# Altium PCB circuit_everything.PcbDoc (part 1 of 3)
Units mm, origin at the board's own origin, x right, y up, seen from the top; angles counter-clockwise.
Board outline 169.67 x 159.89 mm, 2 copper layers (Top Layer, Bottom Layer); 242 components, 162 nets, 656 pads, 43 vias.
Unrouted connection lines stored in the file: 9.
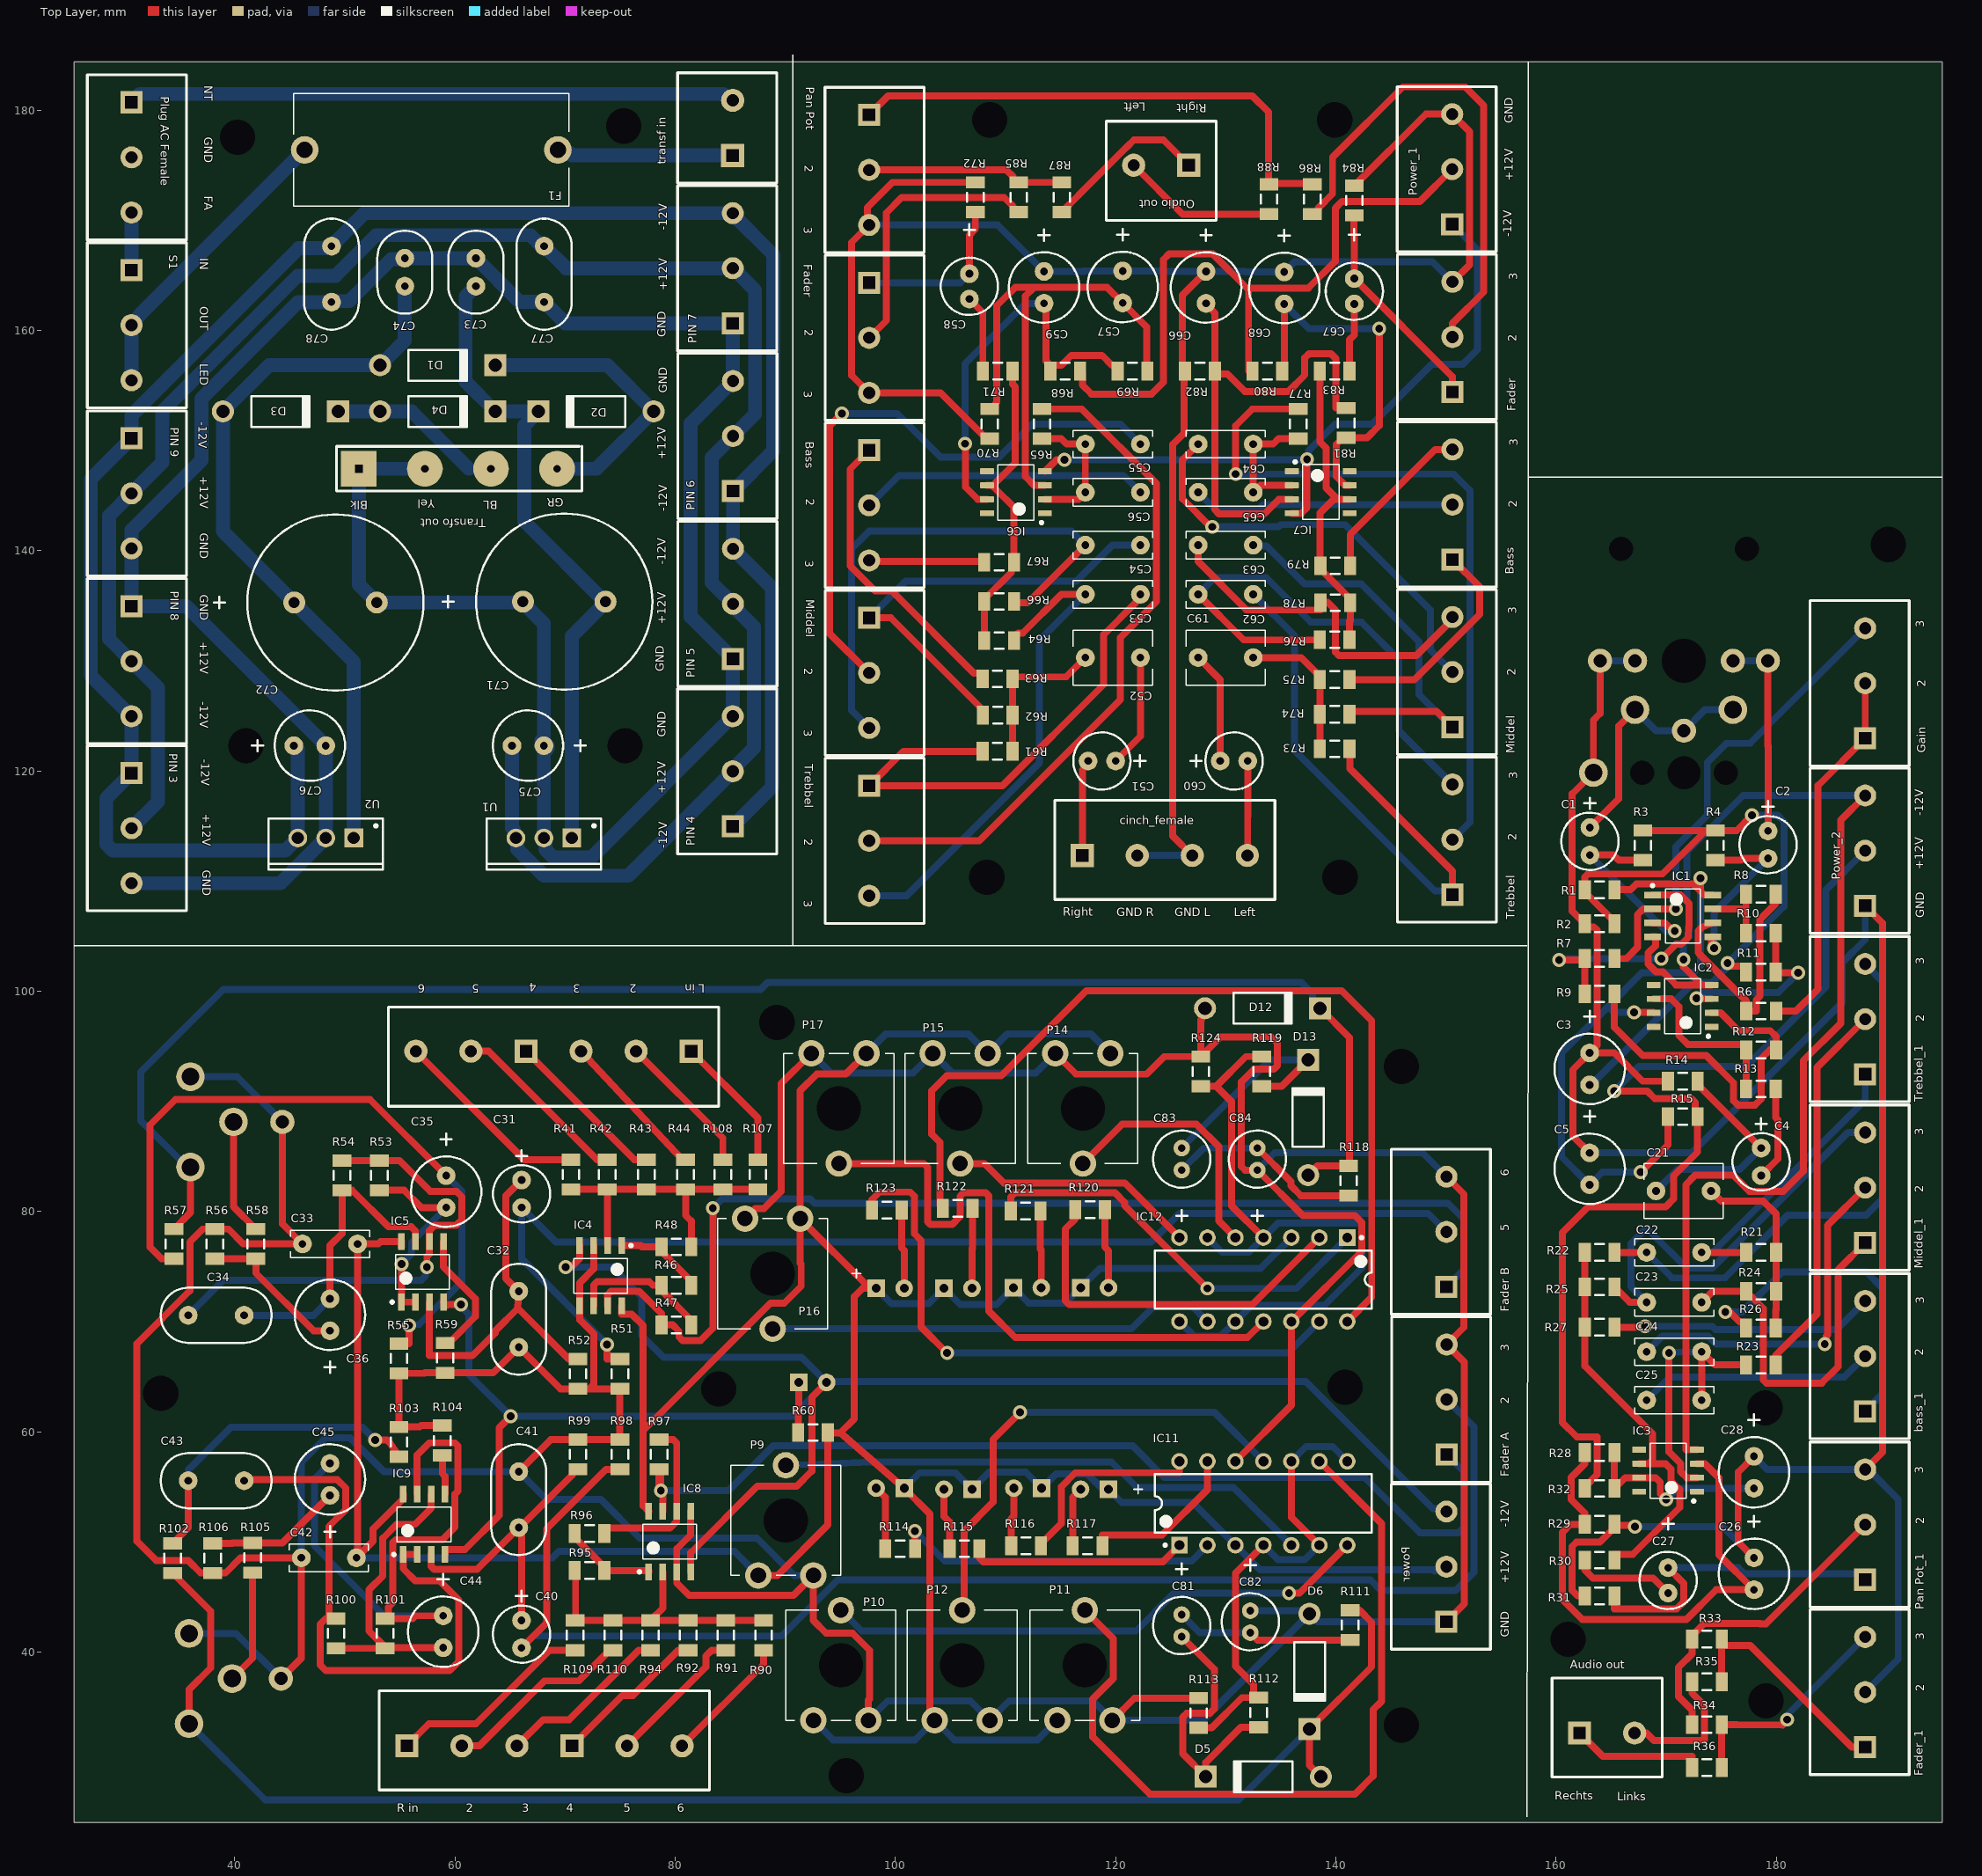
[diagram p0: Top Layer view]
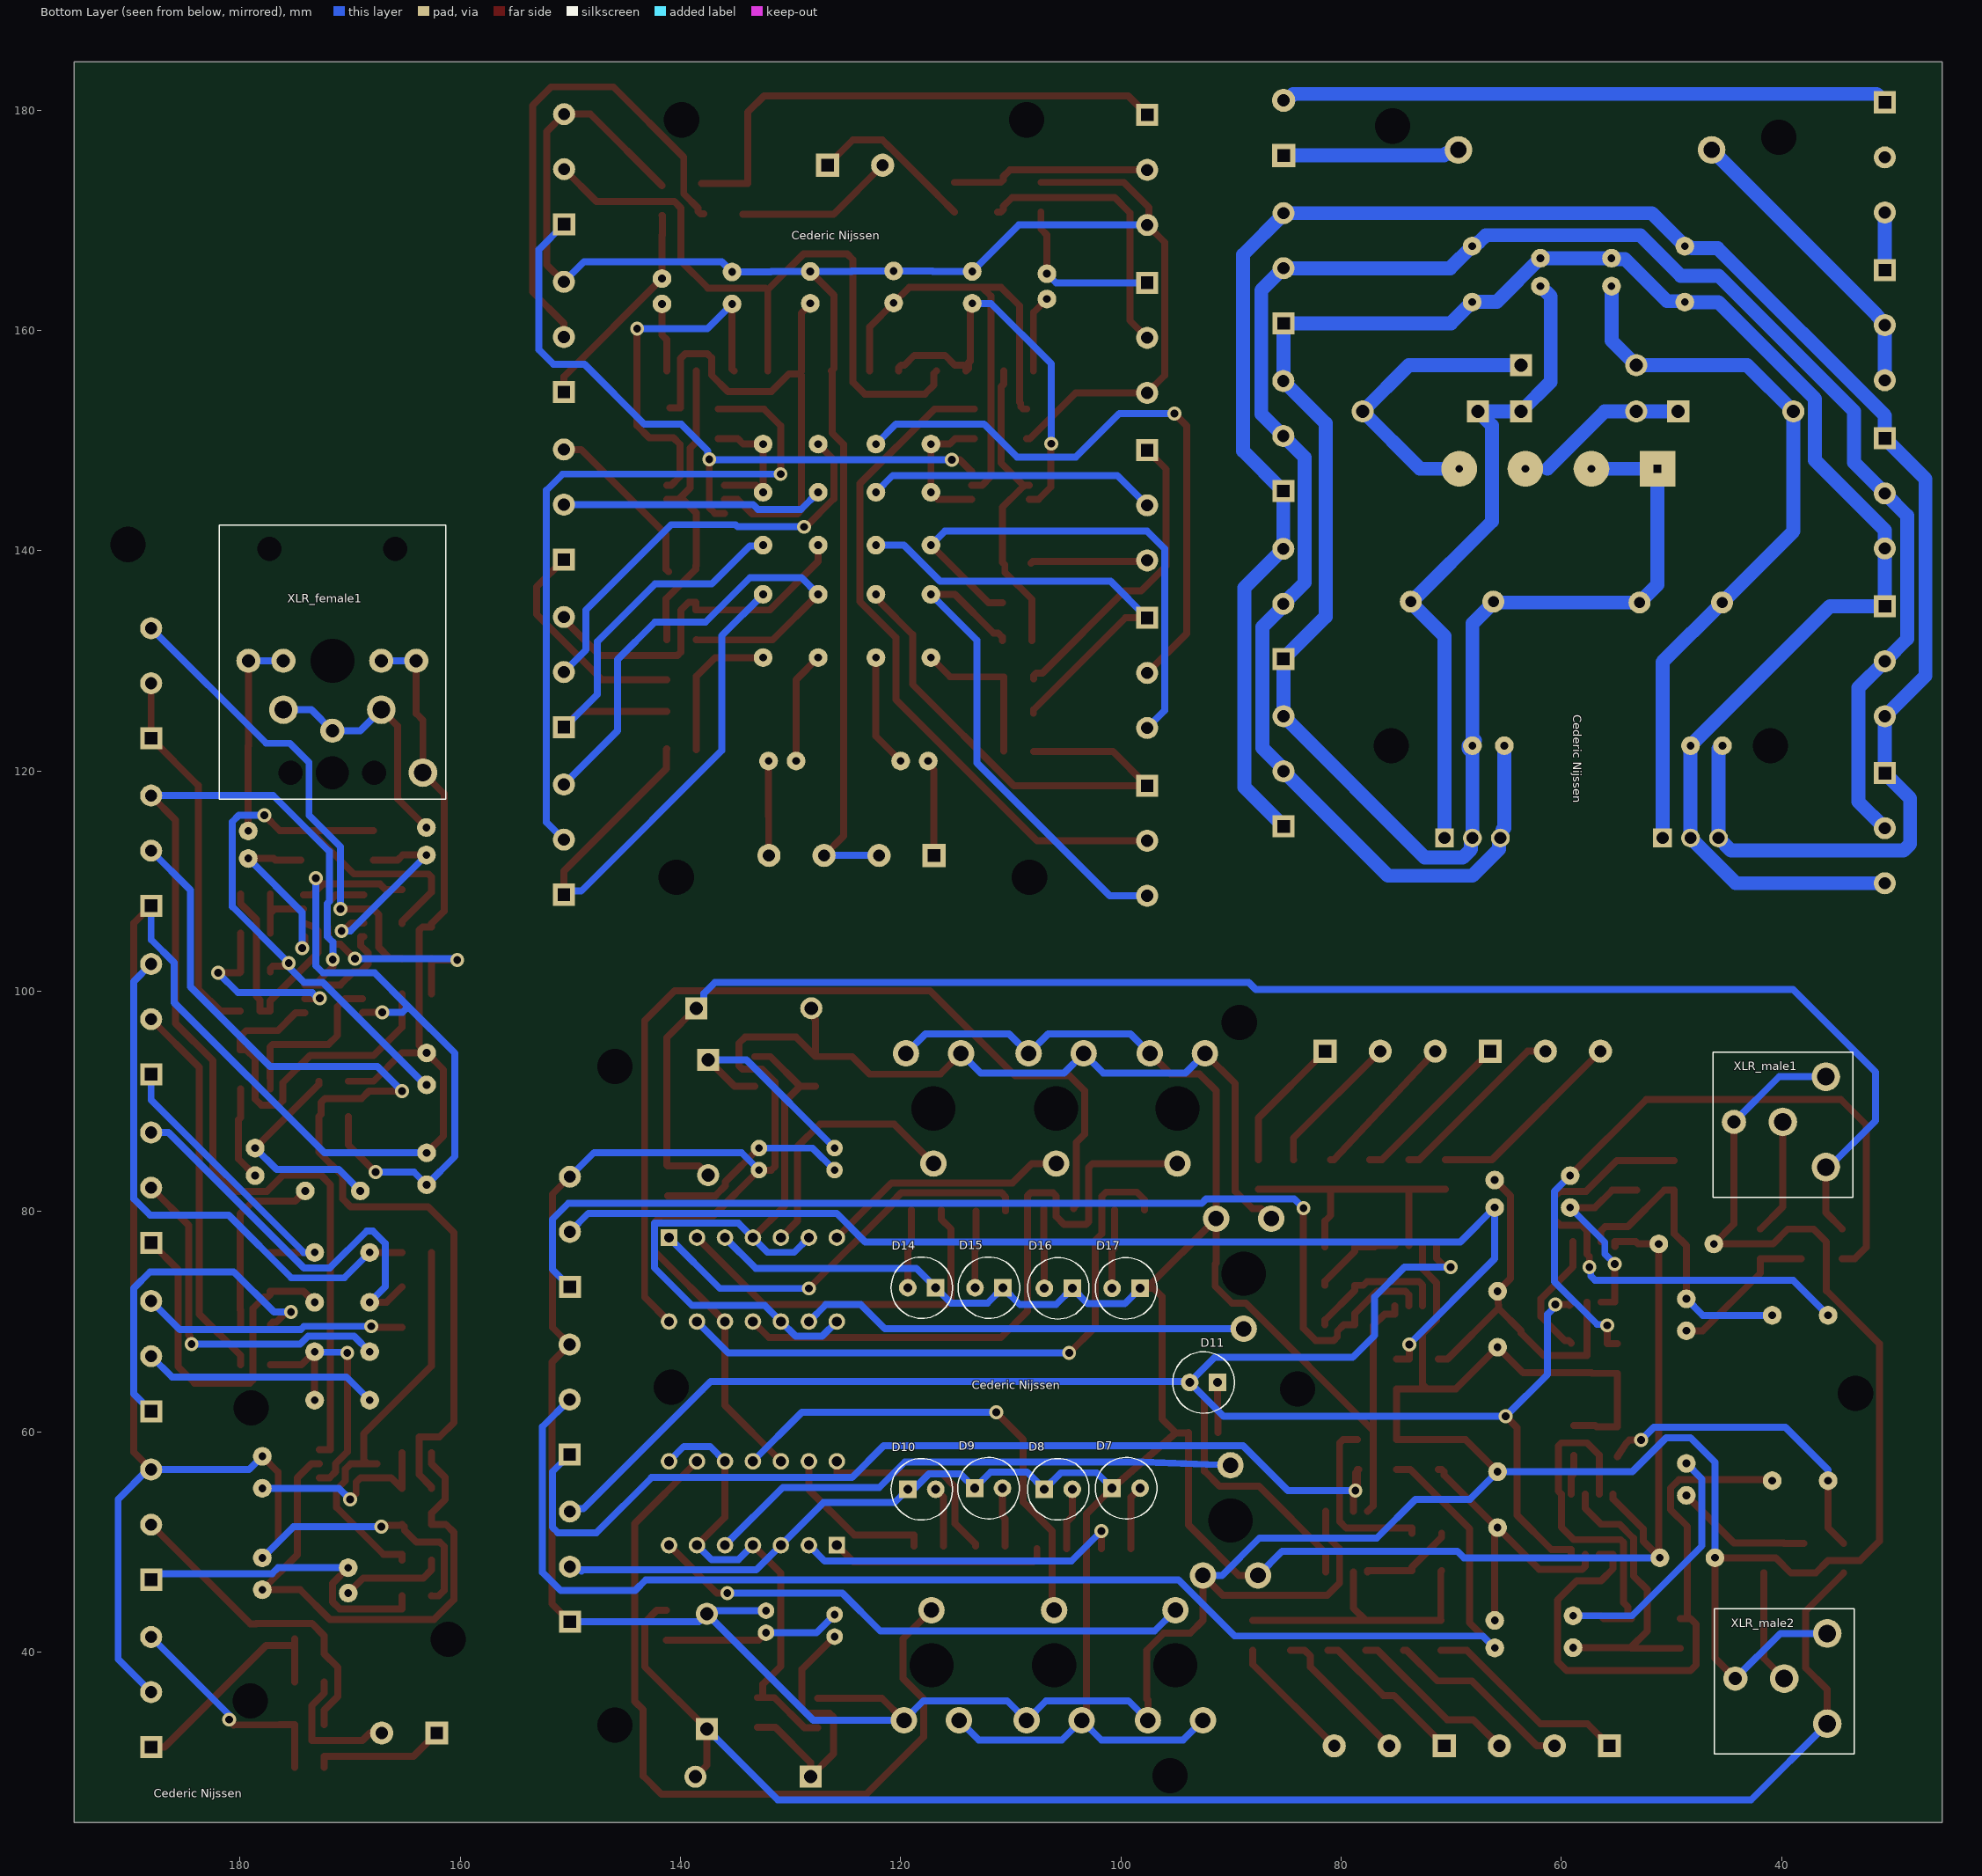
[diagram p1: Bottom Layer view, seen from below]

## Layer stack, top to bottom
Top Solder: solder mask 0.0102, Solder Resist, Dk 3.5
Top Layer: signal copper 0.0356
Dielectric 1: dielectric 0.32, FR-4, Dk 4.8
Bottom Layer: signal copper 0.0356
Bottom Solder: solder mask 0.0102, Solder Resist, Dk 3.5

## Board outline
25.4,24.511 195.072,24.511 195.072,184.404 25.4,184.404

## Design rules (kind name [scope] priority, off if disabled: settings)
Clearance [All] p1: gap=0.254 ignorepadtopadclearanceinfootprint=FALSE except(0: Arc-Hole Track-Hole SMDPad-Hole THPad-Hole Via-Hole Fill-Hole Poly-Hole Region-Hole Text-Hole)
Height [All] p1: minheight=0 maxheight=100 prefheight=12.7
HoleSize [All] p1: absolutevalues=TRUE maxlimit=5.08 minlimit=0.025 maxpercent=80.000 minpercent=20.000
PolygonConnect [All] p1: connectstyle=Relief reliefconductorwidth=0.254 reliefentries=4 polygonreliefangle="90 Angle" airgapwidth=0.254
RoutingVias [All] p1: holewidth=0.711 width=1.27 viastyle="Through Hole" minholewidth=0.711 minwidth=1.27 maxholewidth=0.711 maxwidth=1.27
SolderMaskExpansion [All] p1: expansion=0.102 istentingtop=FALSE
Width [All] p1: maxlimit=1.27 minlimit=0.254 preferedwidth=0.635 minimp=50.000000 maximp=50.000000 favimp=50.000000
28 further rules are at their usual default settings.

## Components (designator, comment, footprint, x,y, rotation, side; value= is the part's Value field where it differs from the comment)
"Audio out" "Header 2" HEADER_2 162.134,32.646 r0 top (schematic designator "PIN 19")
Bass "RPot" HEADER_3 97.606,149.125 r270 top value=470K (schematic designator P2_3A)
Bass "RPot" HEADER_3 150.591,139.197 r90 top value=470K (schematic designator P2_3B)
bass_1 "RPot" HEADER_3 188.076,61.87 r90 top value=470K (schematic designator P8)
C1 "Cap Pol2" "CAPACITOR 10UF" 163.076,112.37 r90 top value=10uF
C2 "Cap Pol2" "CAPACITOR 10UF" 179.253,112.058 r90 top value=10uF
C3 "Cap Pol2" "CAPACITOR 100UF" 163.051,91.5 r90 top value=100uF
C4 "Cap Pol2" "CAPACITOR 10UF" 178.628,83.264 r90 top value=10uF
C5 "Cap Pol2" "CAPACITOR 100UF" 163.051,82.431 r90 top value=100uF
C21 "Cap" "CAPACITOR 1UF" 169.076,81.87 r0 top value=1uF
C22 "Cap" "CAPACITOR 22NF, 47NF, 100NF" 173.226,76.288 r180 top value=47nF
C23 "Cap" "CAPACITOR 22NF, 47NF, 100NF" 173.226,71.754 r180 top value=4n7F
C24 "Cap" "CAPACITOR 22NF, 47NF, 100NF" 168.226,67.27 r0 top value=22nF
C25 "Cap" "CAPACITOR 22NF, 47NF, 100NF" 168.226,62.87 r0 top value=4n7F
C26 "Cap Pol2" "CAPACITOR 100UF" 177.976,45.657 r90 top value=100uF
C27 "Cap Pol2" "CAPACITOR 4U7F" 170.176,45.357 r90 top value=4u7F
C28 "Cap Pol2" "CAPACITOR 100UF" 177.976,54.87 r90 top value=100uF
C31 "Cap" "CAPACITOR 10UF" 66.044,80.359 r90 top value=10uF
C32 "Cap" "CAPACITOR 100PF" 65.784,67.68 r90 top value=100pF
C33 "Cap" "CAPACITOR 22NF, 47NF, 100NF" 46.144,77.059 r0 top value=100nF
C34 "Cap" "CAPACITOR 100PF" 35.764,70.578 r0 top value=100pF
C35 "Cap" "CAPACITOR 100UF" 59.192,80.359 r90 top value=22uF
C36 "Cap" "CAPACITOR 100UF" 48.644,72.073 r270 top value=22uF
C40 "Cap" "CAPACITOR 10UF" 66.038,40.375 r90 top value=10uF
C41 "Cap" "CAPACITOR 100PF" 65.784,56.377 r270 top value=100pF
C42 "Cap" "CAPACITOR 22NF, 47NF, 100NF" 46.044,48.559 r0 top value=100nF
C43 "Cap" "CAPACITOR 100PF" 40.844,55.559 r180 top value=100pF
C44 "Cap" "CAPACITOR 100UF" 58.926,40.396 r90 top value=100pF
C45 "Cap" "CAPACITOR 100UF" 48.644,57.127 r270 top value=22uF
C51 "Cap Pol2" "CAPACITOR 10UF" 117.498,120.909 r0 top value=10uF
C52 "Cap" "CAPACITOR 1UF" 122.248,130.299 r180 top value=1uF
C53 "Cap" "CAPACITOR 22NF, 47NF, 100NF" 122.248,136.042 r180 top value=47nF
C54 "Cap" "CAPACITOR 22NF, 47NF, 100NF" 122.248,140.51 r180 top value=4n7F
C55 "Cap" "CAPACITOR 22NF, 47NF, 100NF" 122.248,149.686 r180 top value=22nF
C56 "Cap" "CAPACITOR 22NF, 47NF, 100NF" 122.248,145.311 r180 top value=4n7F
C57 "Cap Pol2" "CAPACITOR 100UF" 120.638,162.504 r90 top value=100uF
C58 "Cap Pol2" "CAPACITOR 4U7F" 106.717,162.857 r90 top value=4u7F
C59 "Cap Pol2" "CAPACITOR 100UF" 113.498,162.461 r90 top value=100uF
C60 "Cap Pol2" "CAPACITOR 10UF" 131.998,120.909 r180 top value=10uF
C61 "Cap" "CAPACITOR 1UF" 127.492,130.299 r0 top value=1uF
C62 "Cap" "CAPACITOR 22NF, 47NF, 100NF" 132.492,136.042 r180 top value=47nF
C63 "Cap" "CAPACITOR 22NF, 47NF, 100NF" 132.492,140.51 r180 top value=4n7F
C64 "Cap" "CAPACITOR 22NF, 47NF, 100NF" 127.492,149.686 r0 top value=22nF
C65 "Cap" "CAPACITOR 22NF, 47NF, 100NF" 127.492,145.311 r0 top value=4n7F
C66 "Cap Pol2" "CAPACITOR 100UF" 128.21,162.461 r90 top value=100uF
C67 "Cap Pol2" "CAPACITOR 4U7F" 141.676,162.413 r90 top value=4u7F
C68 "Cap Pol2" "CAPACITOR 100UF" 135.312,162.413 r90 top value=100uF
C71 "Cap Pol2" "CAPACITOR 2200UF" 73.667,135.382 r180 top value=2200uF
C72 "Cap Pol2" "CAPACITOR 2200UF" 52.89,135.302 r180 top value=2200uF
C73 "Cap" 220PpF 61.895,166.564 r270 top value=220pF
C74 "Cap" 220PpF 55.436,164.024 r90 top value=220pF
C75 "Cap Pol2" "CAPACITOR 100UF" 65.172,122.301 r0 top value=100uF
C76 "Cap Pol2" "CAPACITOR 100UF" 48.26,122.301 r180 top value=100uF
C77 "Cap" "CAPACITOR 100PF" 68.094,162.578 r90 top value=100pF
C78 "Cap" "CAPACITOR 100PF" 48.783,167.658 r270 top value=100pF
C81 "Cap Pol2" "CAPACITOR 47UF" 125.992,41.401 r90 top value=47uF
C82 "Cap Pol2" "CAPACITOR 47UF" 132.228,41.755 r90 top value=47uF
C83 "Cap Pol2" "CAPACITOR 47UF" 126.005,85.76 r270 top value=47uF
C84 "Cap Pol2" "CAPACITOR 47UF" 132.863,85.76 r270 top value=47uF
cinch_female "cinch_female" HEADER_4 116.96,112.331 r0 top
D1 "Diode 1N4007" DO-41 58.42,156.846 r0 top
D2 "Diode 1N4007" DO-41 72.81,152.654 r180 top
D3 "Diode 1N4007" DO-41 44.144,152.654 r0 top
D4 "Diode 1N4007" DO-41 58.42,152.654 r0 top
D5 "Diode 1N4007" DO-41 133.417,28.677 r180 top
D6 "Diode 1N4007" DO-41 137.608,38.251 r270 top
D7 "LED1" LED 100.791,54.88 r180 bottom
D8 "LED1" LED 106.951,54.78 r180 bottom
D9 "LED1" LED 113.291,54.88 r180 bottom
D10 "LED1" LED 119.351,54.78 r180 bottom
D11 "LED1" LED 91.211,64.48 r0 bottom
D12 "Diode 1N4007" DO-41 133.344,98.459 r0 top
D13 "Diode 1N4007" DO-41 137.481,88.54 r90 top
D14 "LED1" LED 116.811,73.08 r0 bottom
D15 "LED1" LED 110.711,73.08 r0 bottom
D16 "LED1" LED 104.411,73.031 r0 bottom
D17 "LED1" LED 98.251,73.031 r0 bottom
F1 "Fuse_case" FLUSE_HOLDER 46.342,176.403 r0 top
Fader "RPot" HEADER_3 97.606,164.339 r270 top value=470K (schematic designator P2_4A)
Fader "RPot" HEADER_3 150.591,154.416 r90 top value=470K (schematic designator P2_4B)
"Fader A" "RPot" header_3 150.071,57.928 r90 top value=47k (schematic designator P2_5B)
"Fader B" "RPot" header_3 150.044,73.159 r90 top value=47k (schematic designator P2_5A)
Fader_1 "RPot" HEADER_3 188.076,31.37 r90 top value=10K (schematic designator P6)
Gain "RPot" HEADER_3 188.076,122.97 r90 top value=470K (schematic designator P13)
IC1 "LM833DR2G" OPAMP_LM833 171.501,106.845 r0 top locked
IC2 "TL061CD" OPAMP_TL061 171.501,98.672 r180 top
IC3 "TL061CD" OPAMP_TL061 170.176,56.47 r180 top
IC4 "LM833DR2G" OPAMP_LM833 73.224,74.17 r270 top
IC5 "LM833DR2G" OPAMP_LM833 57.039,74.519 r90 top
IC6 "TL061CD" OPAMP_TL061 110.941,145.311 r180 top
IC7 "TL061CD" OPAMP_TL061 138.627,145.311 r0 top
IC8 "LM833DR2G" OPAMP_LM833 79.5,50.027 r90 top
IC9 "LM833DR2G" OPAMP_LM833 57.195,51.593 r90 top
IC11 "LM339N" OPAMP_LM339 133.417,53.511 r90 top
IC12 "LM339N" OPAMP_LM339 133.417,73.821 r270 top
"L in" "Header 6" HEADER_6 81.444,94.559 r180 top (schematic designator "PIN 14")
Middel "RPot" HEADER_3 97.606,133.906 r270 top value=100K (schematic designator P2_2A)
Middel "RPot" HEADER_3 150.591,123.986 r90 top value=100K (schematic designator P2_2B)
Middel_1 "RPot" HEADER_3 188.076,77.17 r90 top value=100K (schematic designator P7)
"Oudio out" "Header 2" HEADER_2 126.635,175.007 r180 top (schematic designator "PIN 17")
P9 "RPot" TRIMMER 90.044,51.959 r0 top value=47K
P10 "RPot" TRIMMER 95.044,38.805 r0 top value=47K
P11 "RPot" TRIMMER 117.2,38.805 r0 top value=47K
P12 "RPot" TRIMMER 106.061,38.805 r0 top value=47K
P14 "RPot" TRIMMER 117.018,89.359 r180 top value=47K
P15 "RPot" TRIMMER 105.879,89.359 r180 top value=47K
P16 "RPot" TRIMMER 88.844,74.359 r180 top value=47K
P17 "RPot" TRIMMER 94.862,89.359 r180 top value=47K
"Pan Pot" "RPot" HEADER_3 97.601,179.578 r270 top value=10K (schematic designator P4)
"Pan Pot_1" "RPot" HEADER_3 188.076,46.57 r90 top value=47K (schematic designator P5)
"PIN 3" "Header 3" HEADER_3 30.607,119.808 r270 top
"PIN 4" "Header 3" HEADER_3 85.217,114.968 r90 top
"PIN 5" "Header 3" HEADER_3 85.245,130.178 r90 top
"PIN 6" "Header 3" HEADER_3 85.245,145.418 r90 top
"PIN 7" "Header 3" HEADER_3 85.217,160.655 r90 top
"PIN 8" "Header 3" HEADER_3 30.607,134.968 r270 top
"PIN 9" "Header 3" HEADER_3 30.607,150.208 r270 top
Power "Header 3" HEADER_3 150.044,42.759 r90 top (schematic designator "PIN 13")
Power_1 "Header 3" HEADER_3 150.565,169.648 r90 top (schematic designator "PIN 16")
Power_2 "Header 3" HEADER_3 188.076,107.77 r90 top (schematic designator "PIN 18")
R1 "Res2" C1206 163.951,109.22 r0 top value=22k
R2 "Res2" C1206 163.951,106.143 r0 top value=22k
R3 "Res2" C1206 167.876,113.252 r270 top value=2k2
R4 "Res2" C1206 174.48,113.252 r90 top value=2k2
R6 "Res2" C1206 178.628,98.208 r0 top value=180
R7 "Res2" C1206 163.951,102.97 r180 top value=10K
R8 "Res2" C1206 178.603,108.82 r180 top value=10K
R9 "Res2" C1206 163.951,99.77 r180 top value=10K
R10 "Res2" C1206 178.603,105.283 r0 top value=10K
R11 "Res2" C1206 178.603,101.745 r0 top value=10K
R12 "Res2" C1206 178.628,94.671 r180 top value=10K
R13 "Res2" C1206 178.603,91.134 r0 top value=560
R14 "Res2" C1206 171.501,91.833 r0 top value=100K
R15 "Res2" C1206 171.501,88.618 r0 top value=100
R21 "Res2" C1206 178.628,76.288 r180 top value=12k
R22 "Res2" C1206 163.951,76.288 r180 top value=12k
R23 "Res2" C1206 178.603,66.07 r180 top value=12k
R24 "Res2" C1206 178.628,72.755 r180 top value=3k9
R25 "Res2" C1206 163.951,73.155 r180 top value=3k9
R26 "Res2" C1206 178.603,69.413 r180 top value=1k8
R27 "Res2" C1206 163.951,69.493 r180 top value=1K8
R28 "Res2" C1206 163.951,58.112 r0 top value=22k
R29 "Res2" C1206 163.951,51.604 r180 top value=22k
R30 "Res2" C1206 163.951,48.35 r180 top value=560
R31 "Res2" C1206 163.951,45.096 r0 top value=100
R32 "Res2" C1206 163.951,54.858 r180 top value=220
R33 "Res2" C1206 173.697,41.186 r0 top value=4k7
R34 "Res2" C1206 173.697,33.408 r0 top value=4k7
R35 "Res2" C1206 173.697,37.297 r180 top value=10K
R36 "Res2" C1206 173.697,29.519 r180 top value=10K
R41 "Res2" C1206 70.526,83.36 r270 top value=1K
R42 "Res2" C1206 73.828,83.36 r270 top value=1K
R43 "Res2" C1206 77.384,83.36 r270 top value=1K
R44 "Res2" C1206 80.94,83.36 r270 top value=1K
R46 "Res2" C1206 80.106,73.297 r180 top value=1K
R47 "Res2" C1206 80.106,69.712 r180 top value=1K
R48 "Res2" C1206 80.106,76.795 r180 top value=10K
R51 "Res2" C1206 74.975,65.252 r90 top value=100K
R52 "Res2" C1206 71.165,65.252 r90 top value=10K
R53 "Res2" C1206 53.133,83.28 r90 top value=10K
R54 "Res2" C1206 49.738,83.28 r270 top value=10K
R55 "Res2" C1206 54.909,66.659 r90 top value=100K
R56 "Res2" C1206 38.192,77.059 r270 top value=100K
R57 "Res2" C1206 34.478,77.059 r90 top value=150
R58 "Res2" C1206 41.906,77.059 r90 top value=150
R59 "Res2" C1206 59.1,66.706 r90 top value=4k7
R60 "Res2" C1206 92.513,59.926 r180 top value=2k7
R61 "Res2" C1206 109.275,121.788 r180 top value=12k
R62 "Res2" C1206 109.29,125.076 r180 top value=3k9
R63 "Res2" C1206 109.275,128.364 r180 top value=1k8
R64 "Res2" C1206 109.417,131.849 r180 top value=12k
R65 "Res2" C1206 113.316,151.526 r270 top value=12k
R66 "Res2" C1206 109.417,135.405 r180 top value=3k9
R67 "Res2" C1206 109.417,138.961 r0 top value=1K8
R68 "Res2" C1206 115.412,156.321 r0 top value=220
R69 "Res2" C1206 121.533,156.321 r180 top value=22k
R70 "Res2" C1206 108.566,151.526 r90 top value=22k
R71 "Res2" C1206 109.29,156.321 r180 top value=560
R72 "Res2" C1206 107.261,172.102 r270 top value=100
R73 "Res2" C1206 139.897,122.023 r0 top value=12k
R74 "Res2" C1206 139.897,125.16 r0 top value=3k9
R75 "Res2" C1206 139.897,128.297 r0 top value=1k8
R76 "Res2" C1206 139.897,131.928 r0 top value=12k
R77 "Res2" C1206 136.582,151.526 r270 top value=12k
R78 "Res2" C1206 139.952,135.278 r0 top value=3k9
R79 "Res2" C1206 139.952,138.628 r180 top value=1K8
R80 "Res2" C1206 133.776,156.321 r180 top value=220
R81 "Res2" C1206 140.947,151.614 r270 top value=22k
R82 "Res2" C1206 127.655,156.321 r0 top value=22k
R83 "Res2" C1206 139.897,156.321 r0 top value=560
R84 "Res2" C1206 141.676,171.803 r270 top value=100
R85 "Res2" C1206 111.198,172.102 r90 top value=4k7
R86 "Res2" C1206 137.866,171.93 r90 top value=4k7
R87 "Res2" C1206 115.107,172.102 r270 top value=10K
R88 "Res2" C1206 133.929,171.93 r270 top value=10K
R90 "Res2" C1206 88.017,41.518 r90 top value=1K
R91 "Res2" C1206 84.596,41.518 r90 top value=1K
R92 "Res2" C1206 81.176,41.518 r90 top value=1K
R94 "Res2" C1206 77.755,41.518 r90 top value=1K
R95 "Res2" C1206 72.215,47.402 r0 top value=10K
R96 "Res2" C1206 72.215,50.769 r0 top value=1K
R97 "Res2" C1206 78.531,57.943 r270 top value=1K
R98 "Res2" C1206 74.975,57.943 r270 top value=100K
R99 "Res2" C1206 71.165,57.943 r270 top value=10K
R100 "Res2" C1206 49.194,41.687 r270 top value=10K
R101 "Res2" C1206 53.639,41.687 r90 top value=10K
R102 "Res2" C1206 34.351,48.523 r270 top value=150
R103 "Res2" C1206 54.909,59.086 r270 top value=100K
R104 "Res2" C1206 58.846,59.213 r270 top value=4k7
R105 "Res2" C1206 41.615,48.559 r270 top value=150
R106 "Res2" C1206 37.983,48.523 r90 top value=100K
R107 "Res2" C1206 87.498,83.36 r270 top value=1K
R108 "Res2" C1206 84.323,83.36 r270 top value=1K
R109 "Res2" C1206 70.913,41.518 r90 top value=1K
R110 "Res2" C1206 74.334,41.518 r90 top value=1K
R111 "Res2" C1206 141.291,42.442 r270 top value=10
R112 "Res2" C1206 132.993,34.515 r90 top value=100K
R113 "Res2" C1206 127.532,34.468 r90 top value=27k
R114 "Res2" C1206 100.429,49.382 r0 top value=470
R115 "Res2" C1206 106.271,49.382 r180 top value=470
R116 "Res2" C1206 111.859,49.636 r180 top value=470
R117 "Res2" C1206 117.447,49.636 r180 top value=470
R118 "Res2" C1206 141.164,82.79 r270 top value=10
R119 "Res2" C1206 133.261,92.722 r90 top value=100K
R120 "Res2" C1206 117.669,80.161 r180 top value=470
R121 "Res2" C1206 111.818,80.05 r0 top value=470
R122 "Res2" C1206 105.651,80.28 r0 top value=470
R123 "Res2" C1206 99.219,80.135 r0 top value=470
R124 "Res2" C1206 127.726,92.722 r90 top value=27k
"R in" "Header 6" HEADER_6 55.621,31.481 r0 top (schematic designator "PIN 15")
S1 "switch" HEADER_3 30.607,165.481 r270 top
"transf in" "trans_in" HEADER_2 85.217,175.895 r90 top (schematic designator PIN1)
"Transfo out" "trans_out" TRANSFO 51.261,147.447 r0 top (schematic designator PIN2)
Trebbel "RPot" HEADER_3 97.606,118.666 r270 top value=100K (schematic designator P2_1A)
Trebbel "RPot" HEADER_3 150.591,108.772 r90 top value=100K (schematic designator P2_1B)
Trebbel_1 "RPot" HEADER_3 188.076,92.47 r90 top value=100K (schematic designator P1)
U1 "L7812ACV" VOLT_REG 68.072,113.919 r180 top
U2 "L7912ACV" VOLT_REG 48.26,113.919 r180 top
XLR_female1 "XLR_female" XLR_FEMAIL_NEUTRIK_NCJ6FA-V 171.616,130.01 r180 bottom
XLR_male1 "XLR_male" XLR_MALE_NEUTRIK_NC3_MAV 36.068,88.138 r270 bottom
XLR_male2 "XLR_male" XLR_MALE_NEUTRIK_NC3_MAV 35.941,37.592 r270 bottom
? "Plug AC Female" HEADER_3 30.607,180.721 r270 top

## Footprints (in the part's own frame and the unit in brackets; to place one, negate y for a bottom-side part, rotate by r counter-clockwise, add the part's x,y. Pads: shape width x height; smd on the part's side, far side on the other; paste and mask are expansions set on the pad)
220PpF [mm]
  round 1.7 hole 0.7: 1(0,0) 2(2.54,0)
  silkscreen extent -2.5,-2.5 5.04,2.5
C1206 [mm] "Chip Capacitor, Body 3.2x1.6mm, IPC High Density"
  rect 1.1x1.7 smd: 1(-1.35,0) 2(1.35,0)
  silkscreen extent -0.4,-0.75 0.4,0.75, body extent -1.7,-0.9 1.7,0.9, height 1.3
"CAPACITOR 1UF" [mm]
  round 1.7 hole 0.7: 1(0,0) 2(5,0)
  silkscreen extent -1.1,-2.5 6.1,2.5
"CAPACITOR 4U7F" [mm]
  round 1.7 hole 0.7: 1(0,0) 2(2.3,0)
  silkscreen extent -1.45,-2.6 6.8,2.6
"CAPACITOR 10UF" [mm]
  round 1.7 hole 0.7: 1(0,0) 2(2.5,0)
  silkscreen extent -1.35,-2.6 5.21,2.6
"CAPACITOR 22NF, 47NF, 100NF" [mm]
  round 1.7 hole 0.7: 1(0,0) 2(5,0)
  silkscreen extent -1.1,-1.25 6.1,1.25
"CAPACITOR 47UF" [mm]
  round 1.5 hole 0.7: 1(0,0) 2(2,0)
  silkscreen extent -1.6,-2.6 6.65,2.6
"CAPACITOR 100PF" [mm]
  round 1.7 hole 0.7: 1(0,0) 2(5.08,0)
  silkscreen extent -2.5,-2.5 7.58,2.5
"CAPACITOR 100UF" [mm]
  round 1.7 hole 0.7: 1(0,0) 2(2.9,0)
  silkscreen extent -1.75,-3.2 6.71,3.2
"CAPACITOR 2200UF" [mm]
  round 2 hole 1: 1(0,0) 2(7.5,0)
  silkscreen extent -4.25,-8 14.8,8
DO-41 [mm] "Diode, Axial; Body 5.2 x 2.7 mm (LxDia. max), Lead Dia. 0.86 mm (max)"
  round 2 hole 1.2: 1(-5.23,0)
  rect 2x2 hole 1.2: 2(5.23,0)
  silkscreen extent -2.65,-1.4 2.75,1.4
FLUSE_HOLDER [mm]
  round 2.5 hole 1.5: 1(0,0) 2(23,0)
  silkscreen extent -1,-5.1 24,5.1, body extent -1.27,-4.43 24.13,4.17, height 2.1
HEADER_2 [mm]
  rect 2.1x2.1 hole 1.1 square: 1(0,0)
  round 2.1 hole 1.1: 2(5,0)
  silkscreen extent -2.5,-4 7.5,5, body extent -2.65,-4 7.5,4, height 10
HEADER_3 [mm]
  rect 2x2 hole 1.1 square: 1(0,0)
  round 2 hole 1.1: 2(5,0) 3(10,0)
  silkscreen extent -2.5,-4 12.5,5, body extent -2.65,-4 12.5,4, height 10
header_3 [mm]
  rect 2x2 hole 1.1 square: 1(0,0)
  round 2 hole 1.1: 2(5,0) 3(10,0)
  silkscreen extent -2.5,-4 12.5,5, body extent -2.65,-4 12.5,4, height 10
HEADER_4 [mm]
  rect 2.1x2.1 hole 1.1 square: 1(0,0)
  round 2.1 hole 1.1: 2(5,0) 3(10,0) 4(15,0)
  silkscreen extent -2.5,-4 17.5,5, body extent -2.67,-4 17.49,4, height 10
HEADER_6 [mm]
  rect 2.1x2.1 hole 1.1 square: 1(0,0) 4(15,0)
  round 2.1 hole 1.1: 2(5,0) 3(10,0) 5(20,0) 6(25,0)
  silkscreen extent -2.5,-4 27.5,5, body extent -2.65,-4 27.5,4, height 10
LED [mm]
  rect 1.6x1.6 hole 0.8: 1(0,0)
  round 1.6 hole 0.8: 2(2.54,0)
  silkscreen extent -1.52,-2.79 4.06,2.79, body extent -1.66,-2.93 3.65,2.93, height 14.18
OPAMP_LM339 [mm] "DIP, 14-Leads, Body 19.7x6.6mm, Pitch 2.54mm"
  rect 1.5x1.5 hole 0.9: 1(-3.81,7.62)
  round 1.5 hole 0.9: 2(-3.81,5.08) 3(-3.81,2.54) 4(-3.81,0) 5(-3.81,-2.54) 6(-3.81,-5.08) 7(-3.81,-7.62) 8(3.81,-7.62) 9(3.81,-5.08) 10(3.81,-2.54) 11(3.81,0) 12(3.81,2.54) 13(3.81,5.08) 14(3.81,7.62)
  silkscreen extent -3.93,-9.85 2.65,9.85, body extent -3.95,-9.85 3.95,9.85, height 5.08
OPAMP_LM833 [mm] "SOIC, 8-Leads, Body 4.9x3.9mm, Pitch 1.27mm"
  rect 1.52x0.6 smd: 1(-2.74,1.905) 2(-2.74,0.635) 3(-2.74,-0.635) 4(-2.74,-1.905) 5(2.74,-1.905) 6(2.74,-0.635) 7(2.74,0.635) 8(2.74,1.905)
  silkscreen extent -2.86,-2.45 1.58,2.88, body extent -1.95,-2.45 1.95,2.45, height 1.75
OPAMP_TL061 [mm] "SOIC, 8-Leads, Body 5x4mm, Pitch 1.27mm, IPC High Density"
  rrect18% 1.25x0.55 smd: 1(-2.625,1.905) 2(-2.625,0.635) 3(-2.625,-0.635) 4(-2.625,-1.905) 5(2.625,-1.905) 6(2.625,-0.635) 7(2.625,0.635) 8(2.625,1.905)
  silkscreen extent -2.45,-2.48 1.65,2.88, body extent -3,-2.45 3,2.45, height 1.63
TRANSFO [mm]
  rect 3.24x3.24 hole 0.7 square: 1(0,0)
  round 3.24 hole 0.7: 2(6,0) 3(12,0) 4(18,0)
  silkscreen extent -2.03,-2.03 20.25,2.03
TRIMMER [mm]
  round 2.4 hole 1.4: 1(-2.5,-5) 2(2.5,-5) 3(0,5)
  round 0 hole 4 unplated: ""(0,0)
  silkscreen extent -5,-5 5,5, body extent -5.15,-5.15 5.15,5.15, height 6.1
VOLT_REG [mm] "TO, Thru-Hole, Vertical, Heatsink Mounted; 3 In-Line Leads; Pitch 2.54 mm"
  rect 1.7x1.7 hole 1.1: 1(-2.54,0)
  round 1.7 hole 1.1: 2(0,0) 3(2.54,0)
  silkscreen extent -5.2,-1.75 5.2,2.85, body extent -5.25,-1.8 5.25,2.9, height 19.7
XLR_FEMAIL_NEUTRIK_NCJ6FA-V [mm]
  round 2.2 hole 1.2: 1(7.62,0) 2(-7.62,0) 3(0,-6.35) 4(4.445,0) 5(-4.445,0)
  round 2.6 hole 1.6: 1(8.225,-10.16) 6(-4.445,-4.445) 6(4.445,-4.445)
  round 0 hole 2.2 unplated: ""(-5.715,10.16) ""(-3.81,-10.16) ""(3.81,-10.16) ""(5.715,10.16)
  round 0 hole 3 unplated: ""(0,-10.16)
  round 0 hole 4 unplated: ""(0,0)
  silkscreen extent -10.29,-12.57 10.29,12.32, body extent -12.5,-14 12.5,16.12, height 32.85
XLR_MALE_NEUTRIK_NC3_MAV [mm]
  round 2.6 hole 1.6: 1(-4.1,0.1) 2(4.1,0.1) 3(0,-3.81)
  round 2.2 hole 1.2: 1(0,-8.25)
  silkscreen extent -6.35,-10.16 6.86,2.54, body extent -12.55,-14.67 12.45,12.63, height 27.21

## Part data
"Audio out" "Oudio out": "Header, 2-Pin", LatestRevisionDate=17-Jul-2002, LatestRevisionNote="Re-released for DXP Platform.", Publisher="Altium Limited"
Bass Bass bass_1 Fader Fader Gain P9 P10 P11 P12 P14 P15 P16 P17 "Pan Pot_1": library part RPot_1, "Potentiometer", LatestRevisionDate=17-Jul-2002, LatestRevisionNote="Re-released for DXP Platform.", PackageDescription="Variable Resistor, Thru-Hole; 3 Leads", PackageReference=VR5, Published=8-Jun-2000, Publisher="Altium Limited", Set Position=0.5, Sim Note="Enter the Resistance value and the set point into parameter fields."
C1 C2 C3 C4 C5 C26 C27 C28: "Polarized Capacitor (Axial)", LatestRevisionDate=17-Jul-2002, LatestRevisionNote="Re-released for DXP Platform.", PackageDescription="Polarized Capacitor; 2 Leads", PackageReference=POLAR0.8, Published=8-Jun-2000, Publisher="Altium Limited"
C21 C22 C23 C24 C25 C31 C32 C34 C35 C40 C41 C43 C44 C52 C53 C54 C55 C56 C61 C62 C63 C64 C65: "Capacitor", LatestRevisionDate=17-Jul-2002, LatestRevisionNote="Re-released for DXP Platform.", PackageDescription="Radial Cap, Thru-Hole; 2 Leads; 0.3 in Pin Spacing", PackageReference=RAD-0.3, Published=8-Jun-2000, Publisher="Altium Limited"
C33 C42 C73 C74 C77 C78: library part Cap_3, "Capacitor", LatestRevisionDate=17-Jul-2002, LatestRevisionNote="Re-released for DXP Platform.", PackageDescription="Radial Cap, Thru-Hole; 2 Leads; 0.3 in Pin Spacing", PackageReference=RAD-0.3, Published=8-Jun-2000, Publisher="Altium Limited"
C36 C45: library part Cap_5, "Capacitor", LatestRevisionDate=17-Jul-2002, LatestRevisionNote="Re-released for DXP Platform.", PackageDescription="Radial Cap, Thru-Hole; 2 Leads; 0.3 in Pin Spacing", PackageReference=RAD-0.3, Published=8-Jun-2000, Publisher="Altium Limited"
C51 C57 C58 C59 C60 C66 C67 C68 C71 C72 C81 C82 C83 C84: "electrolytic", LatestRevisionDate=17-Jul-2002, LatestRevisionNote="Re-released for DXP Platform.", PackageDescription="Polarized Capacitor; 2 Leads", PackageReference=POLAR0.8, Published=8-Jun-2000, Publisher="Altium Limited"
C75 C76: library part "Cap Pol2_2", "Polarized Capacitor (Axial)", LatestRevisionDate=17-Jul-2002, LatestRevisionNote="Re-released for DXP Platform.", PackageDescription="Polarized Capacitor; 2 Leads", PackageReference=POLAR0.8, Published=8-Jun-2000, Publisher="Altium Limited"
D1 D2 D3 D4 D5 D6 D12 D13: "1 Amp General Purpose Rectifier", Code_JEDEC=DO-204-AL, ComponentLink1Description="Manufacturer Link", ComponentLink1URL=http://www.fairchildsemi.com/, ComponentLink2Description=Datasheet, ComponentLink2URL=http://www.fairchildsemi.com/ds/1N%2F1N4001.pdf, DatasheetVersion=1998, LatestRevisionDate=17-Jul-2002, LatestRevisionNote="Re-released for DXP Platform.", PackageDescription="Diode, Axial; Body 5.2 x 2.7 mm (LxDia. max), Lead Dia. 0.86 mm (max)", PackageReference=DO-41, PackageVersion=Aug-1999, Published=8-Jun-2000, Publisher="Altium Limited"
D7 D8 D9 D10 D11 D14 D15 D16 D17: "Typical RED GaAs LED", LatestRevisionDate=08-Jul-2005, LatestRevisionNote="Mech Layer 1 removed.", PackageDescription="LED; 2 Leads", PackageReference=LED-1, Published=8-Jun-2000, Publisher="Altium Limited"
"Fader A" "Fader B" Fader_1 Middel Middel Middel_1 "Pan Pot" Trebbel Trebbel Trebbel_1: "Potentiometer", LatestRevisionDate=17-Jul-2002, LatestRevisionNote="Re-released for DXP Platform.", PackageDescription="Variable Resistor, Thru-Hole; 3 Leads", PackageReference=VR5, Published=8-Jun-2000, Publisher="Altium Limited", Set Position=0.5, Sim Note="Enter the Resistance value and the set point into parameter fields."
IC1 IC4 IC5 IC8 IC9: library part opamp_LM833, "Low Noise, Audio Dual Operational Amplifier, -40 to 85 degC, 8-Pin SOIC, Pb-Free, Tape and Reel", Manufacturer="On Semiconductor", ComponentLink1Description="Manufacturer URL", ComponentLink1URL=http://www.onsemi.com/, ComponentLink2Description=Datasheet, ComponentLink2URL=http://www.onsemi.cn/pub_link/Collateral/LM833-D.PDF, ComponentLink3Description="Package Specification", ComponentLink3URL=http://www.onsemi.com/pub_link/Collateral/751-07.PDF, DatasheetVersion="Rev. 6", GBW Typ (MHz)=15, Mounting Technology="Surface Mount", PackageDescription="8-Pin Small Outline Integrated Circuit, Body 4.9 x 3.9 mm, Pitch 1.27 mm", PackageReference=SOIC-8-751-07, PackageVersion="Rev. AK, 02/2011", Packing="Tape and Reel", PartNumber=LM833DR2G, RoHS=TRUE, SR Typ (V/uS)=7
IC2: library part opamp_L061, "Low-Power JFET-Input General-Purpose Operational Amplifier, 7 to 36 V, 0 to 70 degC, 8-pin SOIC (D8), Green (RoHS & no Sb/Br)", Manufacturer="Texas Instruments", Rating=Military, Total Supply Voltage(Max)(+5V is 5, +/-5V is 10)=36, Total Supply Voltage(Min)(+5V is 5, +/-5V is 10)=7, CMRR(Min)(dB)=70, Code_JEDEC=MS-012, ComponentLink1Description="Manufacturer URL", ComponentLink1URL=http://www.ti.com/, ComponentLink2Description=Datasheet, ComponentLink2URL=http://www.ti.com/lit/ds/symlink/tl061.pdf, ComponentLink3Description="Package Specification", ComponentLink3URL=http://www.ti.com/litv/pdf/msoi002j, DatasheetVersion=SLOS078J, Eco-Plan="Green (RoHS & no Sb/Br)", GBW(Typ)(MHz)=1, IIB(Max)(pA)=400, Iq per channel(Max)(mA)=0.25, Mounting Technology="Surface Mount", Number of Channels=1, Offset Drift(Typ)(uV/C)=10, PackageDescription="8-Pin Plastic Small Outline, Body 4.9 x 3.9 mm, Pitch 1.27 mm", PackageReference=D0008A, PackageVersion="4040047-3/M, 06/2011", PartNumber=TL061CD, Slew Rate(Typ)(V/us)=3.5, Sub Family="General Purpose Amplifier, High Supply Voltage Amplifier (>=30V), Low Power Amp (<=500uA)", Vio (25C)(Max)(mV)=15, Vn at 1kHz(Typ)(nV/rtHz)=42
IC3 IC6 IC7: library part opamp_TL061, "Low-Power JFET-Input General-Purpose Operational Amplifier, 7 to 36 V, 0 to 70 degC, 8-pin SOIC (D8), Green (RoHS & no Sb/Br)", Manufacturer="Texas Instruments", Rating=Military, Total Supply Voltage(Max)(+5V is 5, +/-5V is 10)=36, Total Supply Voltage(Min)(+5V is 5, +/-5V is 10)=7, CMRR(Min)(dB)=70, Code_JEDEC=MS-012, ComponentLink1Description="Manufacturer URL", ComponentLink1URL=http://www.ti.com/, ComponentLink2Description=Datasheet, ComponentLink2URL=http://www.ti.com/lit/ds/symlink/tl061.pdf, ComponentLink3Description="Package Specification", ComponentLink3URL=http://www.ti.com/litv/pdf/msoi002j, DatasheetVersion=SLOS078J, Eco-Plan="Green (RoHS & no Sb/Br)", GBW(Typ)(MHz)=1, IIB(Max)(pA)=400, Iq per channel(Max)(mA)=0.25, Mounting Technology="Surface Mount", Number of Channels=1, Offset Drift(Typ)(uV/C)=10, PackageDescription="8-Pin Plastic Small Outline, Body 4.9 x 3.9 mm, Pitch 1.27 mm", PackageReference=D0008A, PackageVersion="4040047-3/M, 06/2011", PartNumber=TL061CD, Slew Rate(Typ)(V/us)=3.5, Sub Family="General Purpose Amplifier, High Supply Voltage Amplifier (>=30V), Low Power Amp (<=500uA)", Vio (25C)(Max)(mV)=15, Vn at 1kHz(Typ)(nV/rtHz)=42
IC11 IC12: library part opamp_LM339, "Low Power Low Offset Voltage Quad Comparator, 14-pin MDIP", Manufacturer="Texas Instruments", Package Reference=N0014A, PackageTopMarking=NSUZXYYTTE#*LM339N, PowerWise=N, Code_JEDEC=MS-001-AA, ComponentLink1Description="Datasheet URL", ComponentLink1URL=http://www.ti.com/general/docs/lit/getliterature.tsp?genericPartNumber=LM339&fileType=pdf, CompType=Amplifiers, PackageDescription="MDIP, .750 x .250 x.130in, 14 Lead, .100in Pitch", PinCount=14, RoHS=N
"L in" "R in": "Header, 6-Pin", LatestRevisionDate=17-Jul-2002, LatestRevisionNote="Re-released for DXP Platform.", Publisher="Altium Limited"
"PIN 3" "PIN 4" "PIN 5" "PIN 6" "PIN 7" "PIN 8" "PIN 9" Power Power_1 Power_2: "Header, 3-Pin", LatestRevisionDate=17-Jul-2002, LatestRevisionNote="Re-released for DXP Platform.", Publisher="Altium Limited"
R1 R2 R3 R4 R6 R7 R8 R9 R10 R11 R12 R13 R14 R15 R21 R22 R23 R24 R25 R26 R27 R28 R29 R30 R31 R32 R41 R42 R43 R44 R46 R47 R57 R58 R59 R61 R62 R63 R64 R65 R66 R67 R68 R69 R70 R71 R72 R73 R74 R75 R76 R77 R78 R79 R80 R81 R82 R83 R84 R90 R91 R92 R94 R96 R97 R102 R104 R105 R107 R108 R109 R110 R113 R124: "Resistor", LatestRevisionDate=17-Jul-2002, LatestRevisionNote="Re-released for DXP Platform.", PackageDescription="Axial Device, Thru-Hole; 2 Leads; 0.4 in Pin Spacing", PackageReference=AXIAL-0.4, Published=8-Jun-2000, Publisher="Altium Limited"
R33 R34 R85 R86 R114 R115 R116 R117 R120 R121 R122 R123: library part Res2_13, "Resistor", LatestRevisionDate=17-Jul-2002, LatestRevisionNote="Re-released for DXP Platform.", PackageDescription="Axial Device, Thru-Hole; 2 Leads; 0.4 in Pin Spacing", PackageReference=AXIAL-0.4, Published=8-Jun-2000, Publisher="Altium Limited"
R35 R36 R48 R52 R53 R54 R87 R88 R95 R99 R100 R101: library part Res2_3, "Resistor", LatestRevisionDate=17-Jul-2002, LatestRevisionNote="Re-released for DXP Platform.", PackageDescription="Axial Device, Thru-Hole; 2 Leads; 0.4 in Pin Spacing", PackageReference=AXIAL-0.4, Published=8-Jun-2000, Publisher="Altium Limited"
R51 R55 R56 R98 R103 R106 R112 R119: library part Res2_5, "Resistor", LatestRevisionDate=17-Jul-2002, LatestRevisionNote="Re-released for DXP Platform.", PackageDescription="Axial Device, Thru-Hole; 2 Leads; 0.4 in Pin Spacing", PackageReference=AXIAL-0.4, Published=8-Jun-2000, Publisher="Altium Limited"
R60: library part Res_16, "Resistor", LatestRevisionDate=17-Jul-2002, LatestRevisionNote="Re-released for DXP Platform.", PackageDescription="Axial Device, Thru-Hole; 2 Leads; 0.4 in Pin Spacing", PackageReference=AXIAL-0.4, Published=8-Jun-2000, Publisher="Altium Limited"
R111 R118: library part Res2_2, "Resistor", LatestRevisionDate=17-Jul-2002, LatestRevisionNote="Re-released for DXP Platform.", PackageDescription="Axial Device, Thru-Hole; 2 Leads; 0.4 in Pin Spacing", PackageReference=AXIAL-0.4, Published=8-Jun-2000, Publisher="Altium Limited"
"transf in": library part MHDR1X2, "Header, 2-Pin", LatestRevisionDate=17-Jul-2002, LatestRevisionNote="Re-released for DXP Platform.", Publisher="Altium Limited"
"Transfo out": library part MHDR1X4, "Header, 4-Pin", LatestRevisionDate=17-Jul-2002, LatestRevisionNote="Re-released for DXP Platform.", Publisher="Altium Limited"
U1: library part 7812, "Positive Voltage Regulator, 12V, 3-Pin TO-220", ComponentLink1Description="Manufacturer URL", ComponentLink1URL=http://www.st.com, ComponentLink2Description=Datasheet, ComponentLink2URL=http://www.st.com/internet/com/TECHNICAL_RESOURCES/TECHNICAL_LITERATURE/DATASHEET/CD00000444.pdf, ComponentLink3Description="Package Specification", ComponentLink3URL=http://www.st.com/internet/com/TECHNICAL_RESOURCES/TECHNICAL_LITERATURE/PACKAGE_INFORMATION/CD00004649.pdf, DatasheetVersion=16/11/2011, PackageDescription="TO, Thru-Hole, Vertical, Heatsink Mounted; 3 In-Line Leads; Pitch 2.54 mm", PackageReference=TO220, PackageVersion=ver3.0
U2: library part 7912, "2% Negative Voltage Regulator, -12V, 3-Pin TO-220", ComponentLink1Description="Manufacturer URL", ComponentLink1URL=http://www.st.com, ComponentLink2Description=Datasheet, ComponentLink2URL=http://www.st.com/internet/com/TECHNICAL_RESOURCES/TECHNICAL_LITERATURE/DATASHEET/CD00000451.pdf, ComponentLink3Description="Package Specification", ComponentLink3URL=http://www.st.com/internet/com/TECHNICAL_RESOURCES/TECHNICAL_LITERATURE/PACKAGE_INFORMATION/CD00004649.pdf, DatasheetVersion=1/11/2010, PackageDescription="TO, Thru-Hole, Vertical, Heatsink Mounted; 3 In-Line Leads; Pitch 2.54 mm", PackageReference=TO220, PackageVersion=ver3.0
?: "IEC Mains Power Outlet, EN60 320-2-2 F Class I, PC Flange Rear Mount, Chassis Socket", MaximumRating="10A, 250V a.c. (UL & CSA 15A, 250V a.c.)", PackageDocument="ver.80, 15-Sep-2003", ComponentLink1Description="Manufacturer Link", ComponentLink1URL=http://www.bulgin.co.uk/, DatasheetDocument="ver.80, 15-Sep-2003", DrillSize="Corresponds to nominal value.", LatestRevisionDate=15-Jul-2004, LatestRevisionNote="Component Replaced & renamed from \"Phonejack\".", MountingFixtures="Not drawn on schematic symbol.", PackageReference=PX0675/PC, PCB_Layout="Complies with manufacturer's recommendation.", Published=15-Jul-2004, Publisher="Altium Limited", Terminations="P.C. Spills"

## Free pads (board coordinates)
  round 1.524 hole 3.2 unplated: 2(75.438,122.301) 3(41.021,122.301) 5(40.259,177.546) 5(75.311,178.562) 7(145.944,33.359) 9(145.944,93.159) 14(95.544,28.759) 15(140.844,64.059) 16(89.244,97.159) 18(33.274,63.5) 19(83.964,63.879) 21(139.897,179.122) 23(108.554,179.122) 24(108.3,110.339) 25(140.38,110.339) 25(161.076,41.17) 25(178.976,62.17) 25(179.076,35.57) 25(190.176,140.57)

## Via types
v1: diameter 1.27, hole 0.711, Top Layer to Bottom Layer, 43 vias

## Nets (pads, with @x,y where several pads share a name; then routed paths per layer and width w, separated by ;. In a path a pad name is that pad's centre, name@x,y a point inside that pad or via, vN(x,y) a via of type N, cw(c..) or ccw(c..) an arc to the next point about the centre after c; other vN are vias at no path point)
GND: "Fader A.3" "Fader B.3" "Pan Pot.3" "Pan Pot_1.3" "PIN 3.3" "PIN 4.3" "PIN 5.1" "PIN 6.3" "PIN 7.1" "PIN 8.1" "PIN 9.3" "Transfo out.1" "Transfo out.2" C3.2 C5.2 C26.2 C28.2 C32.1 C33.1 C41.1 C42.1 C57.2 C59.2 C66.2 C68.2 C71.2 C72.1 C73.1 C74.2 C75.2 C76.1 C77.1 C78.2 C82.2 C84.2 cinch_female.2 cinch_female.3 D6.1 D12.1 Fader.3 Fader_1.2 IC4.3 IC4.5 IC8.3 IC8.5 IC11.12 IC12.12 P9.2 P10.2 P11.2 P12.2 P14.2 P15.2 P16.2 P17.2 Power.1 Power_1.3 Power_2.1 R2.1 R14.1 R29.1 R31.1 R51.1 R52.1 R55.1 R56.1 R59.1 R70.1 R72.1 R82.1 R84.1 R98.1 R99.1 R103.1 R104.1 R106.1 R113.2 R124.2 U1.2 U2.2 XLR_female1.1 XLR_female1.4 XLR_male1.1 XLR_male2.1 | length 1167.9
  Top Layer w0.635: XLR_male2.1@44.191,37.592 46.044,39.445 C42.1@46.044,48.559 40.527,48.559 39.141,47.173 R106.1@37.983,47.173 36.906,47.173 35.776,48.303 32.868,48.303 31.09,50.081 31.09,67.988 35.916,72.814 35.916,77.241 37.084,78.409 R56.1@38.192,78.409 39.421,78.409 40.771,77.059 C33.1@46.144,77.059 44.318,78.885 XLR_male1.1@44.318,88.138 ; R104.1@58.846,60.563 56.921,60.563 56.794,60.436 R103.1@54.909,60.436 R55.1@54.909,65.309 57.219,65.309 57.266,65.356 R59.1@59.1,65.356 63.46,65.356 C32.1@65.784,67.68 69.562,63.902 R52.1@71.165,63.902 72.191,63.902 ; C41.1@65.784,56.377 68.7,59.293 R99.1@71.165,59.293 R98.1@74.975,59.293 R51.1@74.975,63.902 72.191,63.902 ; IC4.3@72.589,76.91 72.589,74.795 71.319,73.525 IC4.5@71.319,71.43 71.319,70.177 72.593,68.902 72.593,64.305 72.191,63.902 ; IC8.5@81.405,52.767 81.405,50.64 80.135,49.37 IC8.3@80.135,47.287 80.135,46.271 81.253,45.153 90.738,45.153 P9.2@92.544,46.959 92.544,42.867 93.712,41.699 96.114,41.699 97.638,40.175 97.638,35.73 97.544,35.636 P10.2@97.544,33.805 ; P16.2@86.344,79.359 87.267,80.282 88.062,80.282 89.611,81.831 89.611,91.609 P17.2@92.362,94.359 ; R72.1@107.261,173.452 99.733,173.452 97.44,171.159 97.44,169.739 97.601,169.578 96.032,168.008 96.032,155.914 Fader.3@97.606,154.339 104.103,154.339 108.266,150.177 R70.1@108.566,150.177 ; P14.2@114.518,94.359 116.403,92.474 122.811,92.474 124.409,94.072 R124.2@127.726,94.072 ; P11.2@119.7,33.805 121.714,35.818 R113.2@127.532,35.818 ; cinch_female.3@126.96,112.331 125.182,114.109 125.182,149.649 126.232,150.7 126.232,156.248 R82.1@126.305,156.321 126.072,156.553 126.072,157.208 126.054,157.225 126.054,163.206 C66.2@128.21,165.361 ; D12.1@128.114,98.459 127.853,98.198 127.853,97.531 127.726,97.404 R124.2@127.726,94.072 ; IC11.12@130.877,57.321 135.957,62.401 IC12.12@135.957,70.011 142.367,76.42 142.367,78.986 141.732,79.621 137.002,79.621 C84.2@132.863,83.76 131.751,83.76 131.42,84.092 131.42,91.762 132.588,92.931 134.366,92.931 134.696,93.261 134.696,95.268 134.112,95.852 129.506,95.852 R124.2@127.726,94.072 ; R84.1@141.676,173.153 148.171,179.648 Power_1.3@150.565,179.648 152.14,178.073 152.14,165.965 Fader.3@150.591,164.416 ; Power.1@150.044,42.759 151.663,44.378 151.663,66.336 150.071,67.928 151.638,69.495 151.638,81.565 150.044,83.159 ; R31.1@162.601,45.096 R31.1@162.601,45.096 161.976,45.094 161.468,45.602 161.468,49.599 161.84,49.971 163.977,49.971 165.069,51.063 165.069,51.371 R29.1@165.301,51.604 ; C5.2@163.051,85.331 161.519,86.863 161.519,92.868 C3.2@163.051,94.4 ; XLR_female1.1@163.996,130.01 163.996,125.226 163.391,124.621 XLR_female1.1@163.391,119.85 161.468,117.927 161.468,107.275 R2.1@162.601,106.143 162.601,105.851 163.424,105.851 163.729,105.546 163.729,95.078 C3.2@163.051,94.4 ; R29.1@165.484,51.487 167.059,51.487 v1(167.176,51.37) ; R14.1@170.151,91.833 167.871,91.833 165.304,94.4 C3.2@163.051,94.4 ; C26.2@177.976,48.557 176.531,50.002 176.531,56.325 C28.2@177.976,57.77 ; 188.076,56.57 189.662,58.156 189.662,106.184 Power_2.1@188.076,107.77
  Bottom Layer w0.635: XLR_male2.1@35.841,41.692 40.091,41.692 XLR_male2.1@44.191,37.592 ; XLR_male1.1@35.968,92.238 40.218,92.238 XLR_male1.1@44.318,88.138 ; C42.1@46.044,48.559 46.044,57.238 48.26,59.454 50.477,59.454 53.554,56.377 C41.1@65.784,56.377 68.302,53.859 73.244,53.859 76.744,50.359 87.405,50.359 90.805,46.959 P9.2@92.544,46.959 ; P17.2@92.362,94.359 94.145,92.575 101.595,92.575 P15.2@103.379,94.359 105.163,92.575 112.734,92.575 P14.2@114.518,94.359 ; P10.2@97.544,33.805 99.316,35.578 106.788,35.578 P12.2@108.561,33.805 110.334,35.578 117.928,35.578 P11.2@119.7,33.805 127.932,33.805 D6.1@137.608,43.481 ; 97.601,169.578 109.282,169.578 C59.2@113.498,165.361 117.071,165.361 117.114,165.404 124.412,165.404 124.454,165.361 131.746,165.361 131.795,165.313 C68.2@135.312,165.313 136.243,166.244 148.762,166.244 Fader.3@150.591,164.416 ; cinch_female.2@121.96,112.331 cinch_female.3@126.96,112.331 ; C82.2@132.228,43.755 136.554,43.755 136.567,43.742 137.347,43.742 D6.1@137.608,43.481 ; C84.2@132.863,83.76 134.462,85.359 147.844,85.359 150.044,83.159 ; Power.1@150.044,42.759 138.33,42.759 D6.1@137.608,43.481 ; C5.2@163.051,85.331 172.337,85.331 185.976,98.97 185.976,102.592 188.076,104.692 Power_2.1@188.076,107.77 ; XLR_female1.1@163.996,130.01 XLR_female1.4@167.171,130.01 ; v1(167.176,51.37) 175.163,51.37 C26.2@177.976,48.557 ; C28.2@177.976,57.77 179.176,56.57 188.076,56.57 188.376,56.57 191.076,53.87 191.076,39.37 Fader_1.2@188.076,36.37
  Bottom Layer w1.27: 30.607,109.808 44.149,109.808 U2.2@48.26,113.919 ; U2.2@48.26,113.977 C76.1@48.26,122.301 35.593,134.968 30.607,134.968 30.607,140.208 30.607,141.859 36.957,148.209 36.957,153.797 45.738,162.578 C78.2@48.783,162.578 48.865,162.661 50.393,162.661 54.214,166.482 55.354,166.482 C74.2@55.436,166.564 C73.1@61.895,166.564 65.847,162.612 68.06,162.612 70.017,160.655 85.217,160.655 85.231,160.641 85.231,155.432 85.245,155.418 81.407,151.579 81.407,134.016 85.245,130.178 85.217,130.149 85.217,124.968 72.39,112.141 68.961,112.141 68.203,112.899 68.203,113.788 U1.2@68.072,113.919 68.072,121.687 68.432,122.047 C75.2@68.432,122.301 ; 56.261,147.447 51.261,147.447 51.261,136.931 C72.1@52.89,135.302 66.158,135.302 68.072,133.388 C75.2@68.072,123.022 ; C75.2@67.838,122.788 C75.2@68.072,122.555 ; C75.2@68.072,122.301 C75.2@68.072,122.555 ; C75.2@68.326,122.301 C75.2@68.072,122.555
GND_Chasie: ?.2
Net_1: "transf in.2" ?.1 | length 55.2
  Bottom Layer w1.27: ?.1@30.607,180.721 31.369,181.483 84.336,181.483 84.924,180.895 85.217,180.895
Net_3: ?.3 S1.1 | length 5.2
  Bottom Layer w1.27: S1.1@30.607,165.481 ?.3@30.607,170.721
NetC1_1: C1.1 IC1.3 R3.2 | length 17.9
  Top Layer w0.635: C1.1@163.076,112.37 165.228,112.37 165.696,111.901 R3.2@167.876,111.901 ; IC1.3@168.761,106.21 169.876,106.21 170.616,105.47 v1(170.776,105.47)
  Bottom Layer w0.635: C1.1@163.076,112.37 169.976,105.47 v1(170.776,105.47)
NetC1_2: C1.2 XLR_female1.3 XLR_female1.6 | length 22.9
  Top Layer w0.635: C1.2@163.076,114.87 165.685,117.479 165.685,124.079 XLR_female1.6@167.171,125.565
  Bottom Layer w0.635: XLR_female1.6@167.171,125.565 169.076,123.66 XLR_female1.3@171.616,123.66 173.521,125.565 XLR_female1.6@176.061,125.565
NetC2_1: C2.1 IC1.5 R4.1 | length 16.2
  Top Layer w0.635: IC1.5@174.241,104.94 174.118,104.94 174.118,104.149 v1(174.347,103.92) ; R4.1@174.48,111.902 176.785,111.902 176.941,112.058 C2.1@179.253,112.058
  Bottom Layer w0.635: v1(174.347,103.92) 174.347,107.152 C2.1@179.253,112.058
NetC2_2: C2.2 XLR_female1.2 XLR_female1.5 | length 18.6
  Top Layer w0.635: XLR_female1.2@179.236,130.01 179.236,122.276 179.253,122.259 C2.2@179.253,114.558
  Bottom Layer w0.635: XLR_female1.5@176.061,130.01 XLR_female1.2@179.236,130.01
NetC3_1: C3.1 R1.1 R2.2 R3.1 R4.2 R11.1 | length 66.2
  Top Layer w0.635: R2.2@165.301,106.143 165.301,106.308 162.601,109.008 R1.1@162.601,109.22 162.601,110.372 162.88,110.651 169.659,110.651 173.61,114.602 ; R3.1@167.876,114.602 171.171,114.602 ; 171.171,114.602 173.61,114.602 ; v1(175.576,102.57) 175.748,102.57 176.039,102.278 177.021,102.278 177.253,102.045 R11.1@177.253,101.745 ; v1(177.787,115.985) 176.404,114.602 R4.2@174.48,114.602 173.61,114.602
  Bottom Layer w0.635: C3.1@163.051,91.5 163.169,91.5 172.479,100.81 174.182,100.81 175.576,102.204 v1(175.576,102.57) 180.696,107.69 180.696,115.401 180.112,115.985 v1(177.787,115.985)
NetC4_1: C4.1 R13.2 | length 8.6
  Top Layer w0.635: C4.1@178.628,83.264 180.163,84.799 180.163,88.325 179.953,88.535 R13.2@179.953,91.134
NetC4_2: C4.2 C21.1 R14.2 | length 19.6
  Top Layer w0.635: R14.2@172.851,91.833 172.851,91.541 C4.2@178.628,85.764
  Bottom Layer w0.635: C21.1@169.076,81.87 171.023,83.817 176.681,83.817 C4.2@178.628,85.764
NetC5_1: C5.1 IC1.8 IC2.7 R1.2 R15.1 | length 63.2
  Top Layer w0.635: R1.2@165.301,109.22 166.768,109.22 167.285,109.737 172.467,109.737 173.102,109.102 ; v1(167.076,98.07) 168.842,98.07 IC2.7@168.876,98.036 ; v1(167.676,83.57) 170.151,86.045 R15.1@170.151,88.618 ; v1(173.102,110.274) 173.102,109.102 ; IC1.8@174.241,108.75 173.454,108.75 173.102,109.102
  Bottom Layer w0.635: v1(167.076,98.07) 165.261,98.07 164.72,98.612 ; v1(167.676,83.57) 164.19,83.57 C5.1@163.051,82.431 160.476,85.006 160.476,94.368 164.72,98.612 ; v1(173.102,110.274) 173.102,102.308 172.492,101.699 172.111,101.699 172.076,101.663 167.771,101.663 164.72,98.612
NetC21_2: C21.2 R21.1 R24.1 R26.1 | length 17.2
  Top Layer w0.635: C21.2@174.076,81.87 174.993,80.953 178.815,80.953 179.978,79.79 R21.1@179.978,76.288 R24.1@179.978,72.755 179.978,71.078 179.953,71.053 R26.1@179.953,69.413
NetC22_1: C22.1 R21.2 Trebbel_1.1 | length 27
  Top Layer w0.635: C22.1@173.226,76.288 R21.2@177.278,76.288
  Bottom Layer w0.635: C22.1@173.226,76.288 174.222,76.288 188.076,90.142 Trebbel_1.1@188.076,92.47
NetC22_2: C22.2 R22.1 Trebbel_1.3 | length 50.3
  Top Layer w0.635: R22.1@165.301,76.288 C22.2@168.226,76.288
  Bottom Layer w0.635: C22.2@168.226,76.288 170.537,73.978 175.34,73.978 181.025,79.663 188.164,79.663 189.662,81.162 189.662,100.884 Trebbel_1.3@188.076,102.47
NetC23_1: C23.1 Middel_1.1 R24.2 | length 33.1
  Top Layer w0.635: C23.1@173.226,71.754 174.227,72.755 R24.2@177.278,72.755 177.278,72.455 177.511,72.223 177.811,72.223 178.817,71.217 178.817,64.703 179.096,64.423 184.125,64.423 185.615,65.914 185.615,74.709 Middel_1.1@188.076,77.17
NetC23_2: C23.2 Middel_1.3 R25.1 | length 37.7
  Top Layer w0.635: R25.1@165.301,73.154 166.701,71.754 C23.2@168.226,71.754
  Bottom Layer w0.635: C23.2@168.226,71.754 166.802,73.178 166.802,77.098 167.92,78.216 168.504,78.216 171.853,74.867 174.198,74.867 186.501,87.17 Middel_1.3@188.076,87.17
NetC24_1: C24.1 Middel_1.2 | length 32.8
  Top Layer w0.635: v1(184.405,67.963) 184.526,68.085 184.526,68.685 184.659,68.818 184.659,78.753 Middel_1.2@188.076,82.17
  Bottom Layer w0.635: C24.1@168.226,67.27 169.648,68.691 173.815,68.691 174.543,67.963 v1(184.405,67.963)
NetC24_2: C24.2 C25.2 IC3.2 R23.2 | length 24.9
  Top Layer w0.635: v1(170.257,67.177) 170.257,58.175 171.324,57.108 171.324,56.368 171.857,55.835 IC3.2@172.801,55.835 ; C25.2@173.226,62.87 C24.2@173.226,67.27 174.426,66.07 R23.2@177.253,66.07
  Bottom Layer w0.635: v1(170.257,67.177) 170.303,67.224 173.18,67.224 C24.2@173.226,67.27
NetC25_1: bass_1.2 C25.1 | length 21.5
  Bottom Layer w0.635: C25.1@168.226,62.87 170.338,64.982 186.188,64.982 bass_1.2@188.076,66.87
NetC26_1: C26.1 IC3.3 R28.1 R29.2 | length 49.2
  Top Layer w0.635: R28.1@162.601,58.112 162.601,57.098 161.367,55.864 161.367,53.847 162.601,52.612 R29.2@162.601,51.604 162.601,51.596 161.316,51.596 160.579,50.86 160.579,44.767 162.386,42.96 171.838,42.96 174.534,45.657 C26.1@177.976,45.657 174.803,48.829 174.803,55.81 173.508,57.105 IC3.3@172.801,57.105
NetC27_1: C27.1 R30.2 | length 9.3
  Top Layer w0.635: R30.2@162.601,48.35 162.601,47.467 163.348,46.72 168.813,46.72 C27.1@170.176,45.357
NetC27_2: "Pan Pot_1.1" C27.2 R31.2 | length 30.1
  Top Layer w0.635: R31.2@165.301,45.096 165.301,43.926 170.968,43.926 171.603,44.561 171.603,46.23 C27.2@170.176,47.657
  Bottom Layer w0.635: C27.2@170.176,47.657 176.556,47.657 177.087,47.126 188.076,47.126 188.076,46.57
NetC28_1: C28.1 IC3.7 R28.2 R32.1 | length 18.2
  Top Layer w0.635: R28.2@165.301,58.112 R32.1@165.301,54.858 166.278,55.835 IC3.7@167.551,55.835 169.038,55.835 169.462,55.411 169.462,54.395 v1(170.003,53.854)
  Bottom Layer w0.635: v1(170.003,53.854) 171.019,54.87 C28.1@177.976,54.87
NetC31_1: "Fader B.2" C31.1 R51.2 | length 105.2
  Top Layer w0.635: v1(73.812,67.937) 73.812,66.602 R51.2@74.975,66.602
  Bottom Layer w0.635: v1(73.812,67.937) 66.044,75.706 C31.1@66.044,80.359 69.169,77.234 123.215,77.234 125.823,79.841 148.362,79.841 150.044,78.159
NetC31_2: C31.2 C32.2 IC5.3 R52.2 | length 34.9
  Top Layer w0.635: IC5.3@57.674,71.779 57.674,66.921 61.594,66.921 63.651,68.979 63.651,69.155 65.709,71.213 ; C31.2@66.044,82.859 64.618,81.433 64.618,73.926 C32.2@65.784,72.76 65.709,71.213 ; R52.2@71.165,66.602 70.319,66.602 65.709,71.213
NetC34_1: C34.1 IC5.6 R53.2 R54.1 | length 45
  Top Layer w0.635: R54.1@49.738,84.63 R53.2@53.133,84.63 54.961,84.63 57.76,81.831 60.122,81.831 60.63,81.323 60.63,79.291 60.096,78.758 58.157,78.758 57.674,78.275 IC5.6@57.674,77.259 57.674,76.132 57.444,75.902 v1(57.444,74.959)
  Bottom Layer w0.635: C34.1@35.764,70.578 38.94,73.754 56.93,73.754 57.322,74.146 57.322,74.837 v1(57.444,74.959)
NetC34_2: C34.2 C36.1 IC5.7 R54.2 | length 27.9
  Top Layer w0.635: C36.1@48.644,72.073 48.644,76.906 49.738,78.001 R54.2@49.738,81.93 50.65,81.93 53.95,78.631 56.007,78.631 56.404,78.234 IC5.7@56.404,77.259
  Bottom Layer w0.635: C34.2@40.844,70.578 47.148,70.578 C36.1@48.644,72.073
NetC35_1: C35.1 IC5.1 IC5.2 R53.1 | length 18.2
  Top Layer w0.635: R53.1@53.133,81.93 55.372,81.93 56.943,80.359 C35.1@59.192,80.359 ; v1(55.134,75.249) IC5.1@55.134,71.779 IC5.2@56.404,71.779
  Bottom Layer w0.635: v1(55.134,75.249) 56.044,76.159 56.044,77.211 C35.1@59.192,80.359
NetC35_2: C35.2 R55.2 R57.1 | length 63.7
  Top Layer w0.635: R57.1@34.478,75.709 33.351,75.709 32.309,76.751 32.309,87.876 34.595,90.162 52.288,90.162 C35.2@59.192,83.259 ; R55.2@54.909,68.009 55.829,68.009 v1(55.829,69.664)
  Bottom Layer w0.635: v1(55.829,69.664) 55.907,69.742 56.727,69.742 60.63,73.645 60.63,81.821 C35.2@59.192,83.259
NetC36_2: C36.2 R56.2 R58.1 | length 13.9
  Top Layer w0.635: R56.2@38.192,75.709 R58.1@41.906,75.709 41.906,74.416 47.148,69.173 C36.2@48.644,69.173
NetC40_1: "Fader A.2" C40.1 R98.2 | length 127.5
  Top Layer w0.635: C40.1@66.038,40.375 68.326,42.663 68.326,51.199 73.721,56.593 R98.2@74.975,56.593
  Bottom Layer w0.635: C40.1@66.038,40.375 67.122,41.459 89.668,41.459 94.774,46.565 143.139,46.565 144.12,45.585 150.876,45.585 152.527,47.236 152.527,60.472 150.071,62.928
NetC40_2: C40.2 C41.2 IC9.3 R99.2 | length 27
  Top Layer w0.635: IC9.3@57.83,48.853 57.83,47.795 58.109,47.516 62.003,47.516 C41.2@65.784,51.297 ; C40.2@66.038,42.875 66.038,50.755 65.784,51.009 C41.2@65.784,51.297 ; R99.2@71.165,56.593 70.865,56.593 70.632,56.361 70.632,56.061 65.868,51.297 C41.2@65.784,51.297
NetC43_1: C43.1 IC9.1 IC9.2 R100.1 | length 55
  Top Layer w0.635: C43.1@40.844,55.559 40.844,55.669 49.301,55.669 50.089,54.882 50.089,52.951 48.539,51.402 R100.1@48.539,43.037 ; R100.1@49.194,43.037 R100.1@48.539,43.037 ; IC9.2@56.56,48.853 IC9.1@55.29,48.853 55.29,47.573 56.388,46.474 58.598,46.474 60.35,44.722 60.35,39.159 59.512,38.321 48.26,38.321 47.752,38.829 47.752,42.529 48.26,43.037 R100.1@48.539,43.037
NetC43_2: C43.2 R102.1 R103.2 | length 29.3
  Top Layer w0.635: R102.1@34.351,49.873 35.764,51.286 C43.2@35.764,55.559 ; v1(52.744,59.259) 53.814,59.259 54.077,58.996 R103.2@54.909,57.736
  Bottom Layer w0.635: C43.2@35.764,55.559 35.764,56.533 39.649,60.419 51.584,60.419 v1(52.744,59.259)
NetC44_1: C44.1 IC9.6 R100.2 R101.1 | length 27.6
  Top Layer w0.635: R100.2@49.194,40.337 R101.1@53.639,40.337 R101.1@53.703,40.396 ; IC9.6@57.83,54.333 57.83,53.047 56.388,51.605 54.712,51.605 53.442,50.335 53.442,46.906 52.197,45.661 52.197,41.902 R101.1@53.703,40.396 ; C44.1@58.926,40.396 R101.1@53.703,40.396
NetC44_2: C44.2 C45.1 IC9.7 R101.2 | length 56.4
  Top Layer w0.635: R101.2@53.639,43.037 R101.2@53.95,43.037 ; IC9.7@56.56,54.333 56.56,57.898 57.658,58.996 59.995,58.996 60.274,58.717 60.274,54.628 59.995,54.348 59.995,51.351 58.852,50.208 54.61,50.208 54.356,49.954 54.356,44.493 53.95,44.087 R101.2@53.95,43.037 ; C44.2@58.926,43.296 56.393,43.296 56.134,43.037 R101.2@53.95,43.037
  Bottom Layer w0.635: C45.1@48.644,57.127 47.219,55.702 47.219,49.649 53.572,43.296 C44.2@58.926,43.296
NetC45_2: C45.2 R105.1 R106.2 | length 12.5
  Top Layer w0.635: R106.2@37.983,49.873 39.776,49.873 39.812,49.909 R105.1@41.615,49.909 44.326,49.909 C45.2@48.644,54.227
NetC51_1: C51.1 cinch_female.1 | length 8.8